# Altium PCB chicker.PcbDoc
Units mm, origin at the board's own origin, x right, y up, seen from the top; angles counter-clockwise.
Board outline 98.04 x 99.82 mm, 2 copper layers (Top Layer, Bottom Layer); 29 components, 18 nets, 100 pads, 33 vias.
Unrouted connection lines stored in the file: 10.
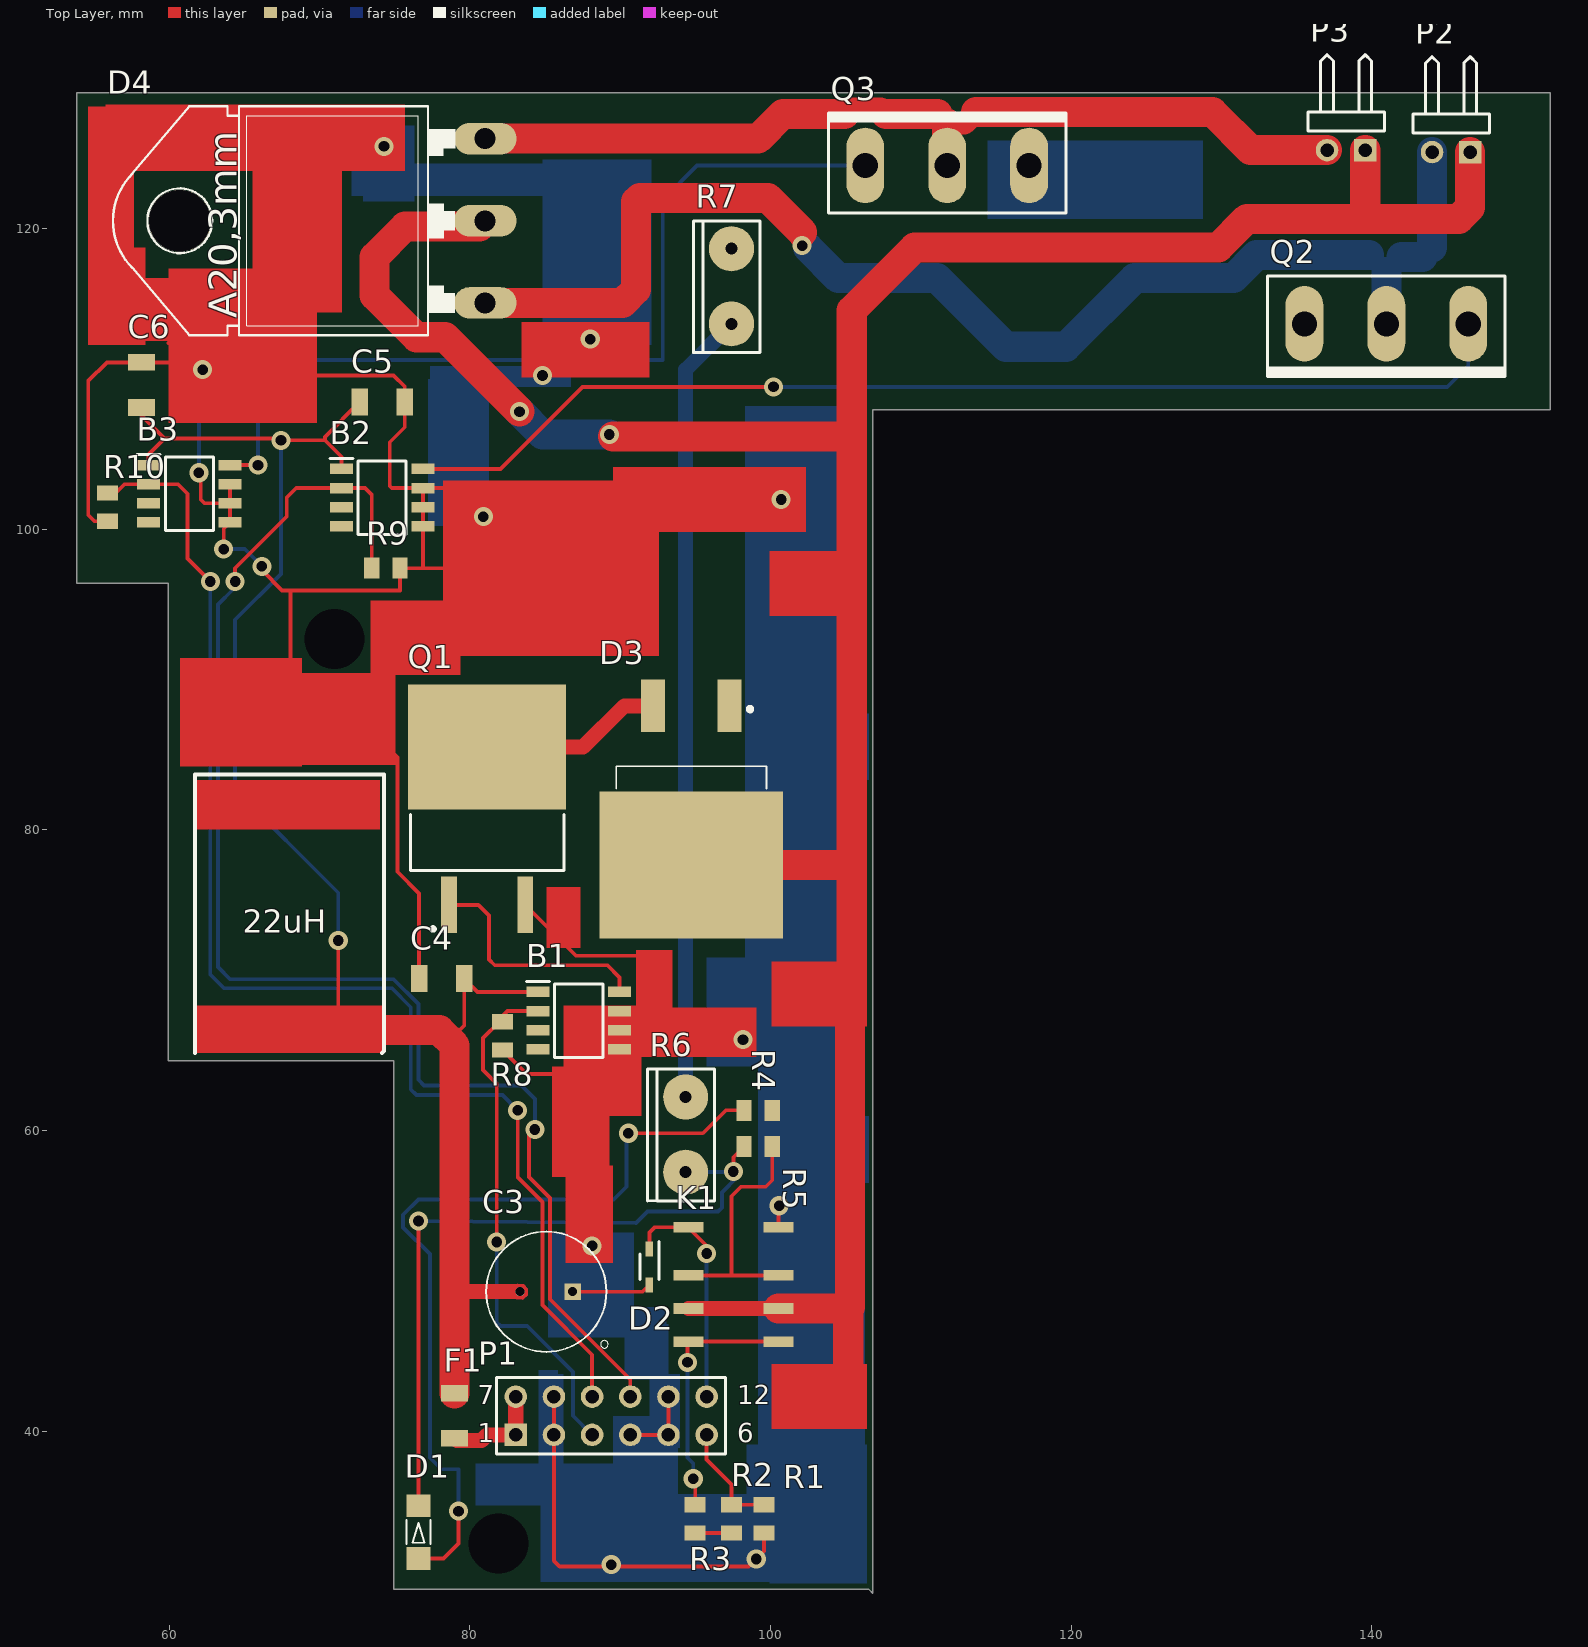
[diagram p0: Top Layer view]
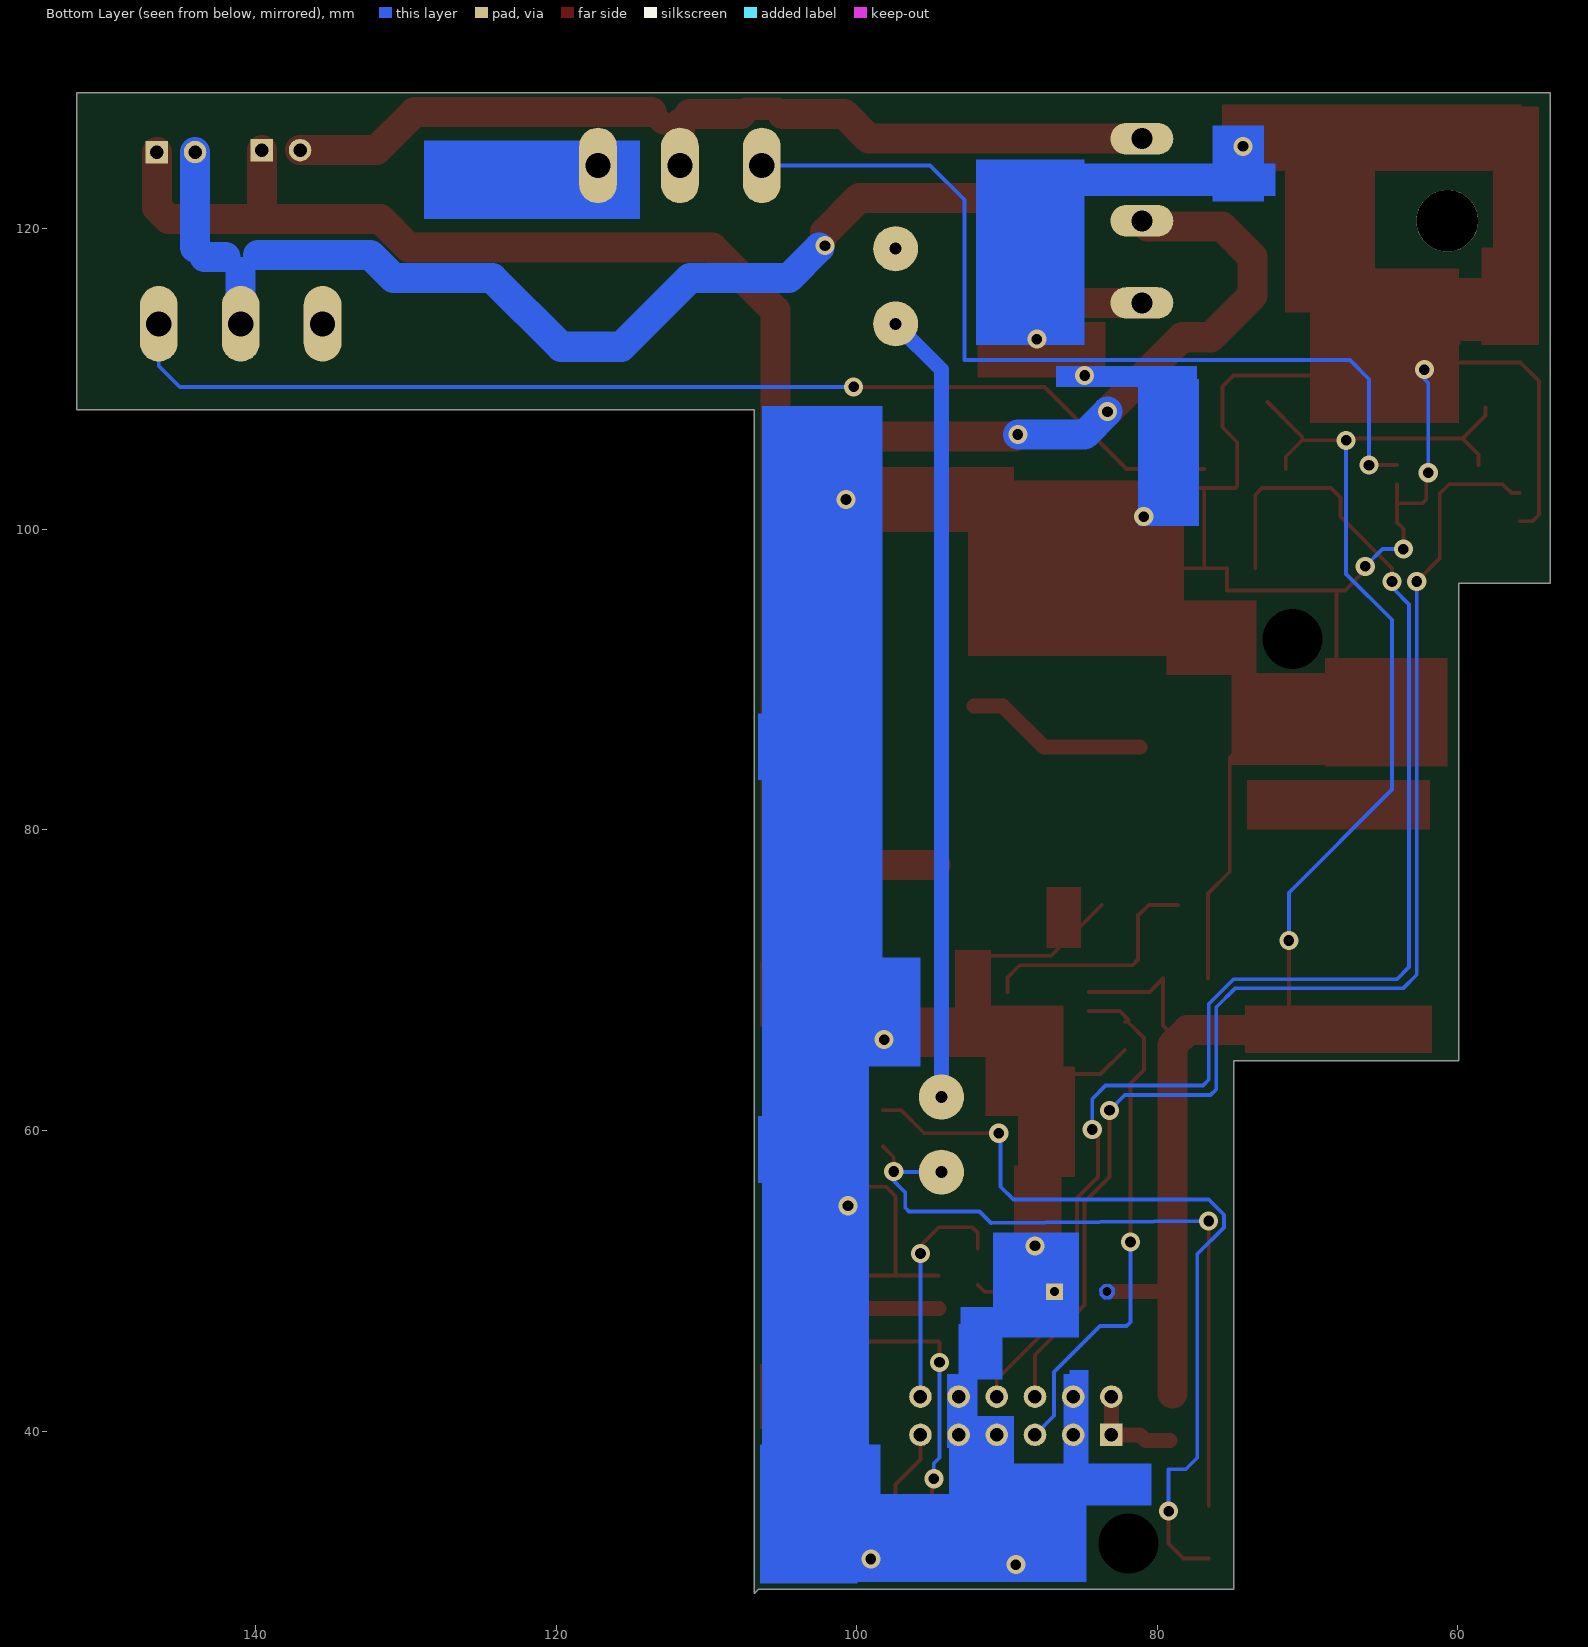
[diagram p1: Bottom Layer view, seen from below]

## Layer stack, top to bottom
Top Solder: solder mask 0.0102, Solder Resist, Dk 3.5
Top Layer: signal copper 0.0356
Dielectric 1: dielectric 0.32, FR-4, Dk 4.8
Bottom Layer: signal copper 0.0356
Bottom Solder: solder mask 0.0102, Solder Resist, Dk 3.5

## Board outline
74.93,29.464 74.93,64.643 59.944,64.643 59.944,96.393 53.848,96.393 53.848,129.032 151.892,129.032 151.892,107.95 106.807,107.95 106.807,29.21 106.553,29.464 74.93,29.464

## Design rules (kind name [scope] priority, off if disabled: settings)
Clearance [All] p1: gap=0.254
PolygonConnect [All] p1: connectstyle=Relief reliefconductorwidth=0.254 reliefentries=4 polygonreliefangle="90 Angle" airgapwidth=0.254
RoomDefinition chicker [InComponentClass('chicker')] p1: confinementstyle=ConfineIn formatcopy=TRUE lockcomponents=FALSE outline 178.943,26.797 392.049,26.797 392.049,57.404 178.943,57.404
RoutingVias [All] p1: holewidth=0.711 width=1.27 viastyle="Through Hole" minholewidth=0.711 minwidth=1.27 maxholewidth=0.711 maxwidth=1.27
SolderMaskExpansion [All] p1: expansion=0.102
Width [All] p1: maxlimit=0.254 minlimit=0.254 preferedwidth=0.254
30 further rules are at their usual default settings.

## Components (designator, comment, footprint, x,y, rotation, side; value= is the part's Value field where it differs from the comment)
B1 "MIC5020YM" SOIC127P600X188-8N 87.249,67.31 r0 top
B2 "MIC5020YM" SOIC127P600X188-8N 74.168,102.108 r0 top
B3 "MIC5020YM" SOIC127P600X188-8N 61.341,102.362 r0 top
C3 "ECA-1HM101" CAPPRD350W60D800H1150B_ECA-1HM101(Primary) 85.09,49.276 r180 top
C4 "CL31A226KOCLFNC" CAPC3216X100N 78.129,70.104 r180 top
C5 "CL31A226KOCLFNC" CAPC3216X100N 74.168,108.458 r0 top
C6 "CL31A226KOCLFNC" CAPC3216X100N 58.166,109.601 r90 top
D1 "RED" WL-SMRW-1206-RECT 76.581,33.274 r270 top
D2 "NSR0240HT1G" SOD2512X110N 91.948,50.927 r270 top
D3 "STTH10R04G-TR" DPAK508P1542X460-3N 94.742,81.534 r180 top
D4 "RURG3060CC" SOT93_TIP147(Primary) 70.866,120.523 r90 top
F1 "Fuse 1" FUSM3216X140N 78.994,41.021 r270 top
K1 "IM03DGR" GULLWINGS 97.536,49.657 r270 top
P1 "Header 6X2A" HDR2X6_CEN 83.058,39.751 r0 top
P2 "Header 2H" HDR1X2H 146.558,125.095 r180 top
P3 "Header 2H" HDR1X2H 139.573,125.222 r180 top
Q1 "STB45N65M5" TO254P1542X460-3N 81.153,81.407 r90 top
Q2 "FGA180N33ATDTU" TO-3PN_V_FDA69N25(Primary) 140.981,113.665 r180 top
Q3 "FGA180N33ATDTU" TO-3PN_V_FDA69N25(Primary) 111.76,124.206 r0 top
R1 "2.2k" RESC2013X65N 99.568,34.163 r90 top
R2 "" RESC2013X65N 97.409,34.163 r90 top
R3 "" RESC2013X65N 94.996,34.163 r270 top
R4 "" RESC2013X65N 99.187,61.341 r180 top
R5 "" RESC2013X65N 99.187,58.928 r0 top
R6 "PF2203-2KF1" POWER_DIODE 94.361,57.23 r90 top
R7 "PF2203-2KF1" POWER_DIODE 97.409,113.665 r90 top
R8 "" RESC2013X65N 82.169,66.294 r270 top
R9 "" RESC2013X65N 74.422,97.409 r0 top
R10 "" RESC2013X65N 55.88,101.473 r270 top

## Footprints (in the part's own frame and the unit in brackets; to place one, negate y for a bottom-side part, rotate by r counter-clockwise, add the part's x,y. Pads: shape width x height; smd on the part's side, far side on the other; paste and mask are expansions set on the pad)
CAPC3216X100N [mm]
  rect 1.1x1.8 smd: 1(-1.5,0) 2(1.5,0)
CAPPRD350W60D800H1150B_ECA-1HM101(Primary) [mm]
  rect 1.108x1.108 hole 0.6: NEG(-1.75,0)
  round 0.6 hole 0.6: POS(1.75,0)
  Top Layer region: 2.271,0.189 1.984,0.502 1.561,0.521 1.248,0.234 1.229,-0.189 1.516,-0.502 1.939,-0.521 2.252,-0.234
  Bottom Layer region: 2.271,0.189 1.984,0.502 1.561,0.521 1.248,0.234 1.229,-0.189 1.516,-0.502 1.939,-0.521 2.252,-0.234
  Multi-Layer region: 2.271,0.189 1.984,0.502 1.561,0.521 1.248,0.234 1.229,-0.189 1.516,-0.502 1.939,-0.521 2.252,-0.234
  silkscreen extent -4.12,-4 4,4
DPAK508P1542X460-3N [mm]
  rect 1.6x3.5 smd: 1(-2.54,-6.715) 2(2.54,-6.715)
  rect 12.2x9.75 smd: 3(0,3.87)
  silkscreen extent -5,-6.64 5,-1.2
FUSM3216X140N [mil]
  rect 44x71 smd: 1(-59,0) 2(59,0)
GULLWINGS [mm]
  rect 0.7x2 smd: 1(-3.9,-3) 2(-0.7,-3) 3(1.5,-3) 4(3.7,-3) 5(3.7,3) 6(1.5,3) 7(-0.7,3) 8(-3.9,3)
HDR1X2H [mm] "Connector; Header; 2 Position; Right Angle"
  rect 1.5x1.5 hole 0.9: 1(0,0)
  round 1.5 hole 0.9: 2(2.54,0)
  silkscreen extent -1.27,-6.35 3.81,-1.27
HDR2X6_CEN [mm] "Connector; Header; 6x2 Position"
  rect 1.5x1.5 hole 0.9: 1(0,0)
  round 1.5 hole 0.9: 2(2.54,0) 3(5.08,0) 4(7.62,0) 5(10.16,0) 6(12.7,0) 7(0,2.54) 8(2.54,2.54) 9(5.08,2.54) 10(7.62,2.54) 11(10.16,2.54) 12(12.7,2.54)
  silkscreen extent -1.27,-1.27 13.97,3.81
POWER_DIODE [mm]
  round 3 hole 0.8: A(0,0) K(5,0)
  silkscreen extent -1.91,-1.91 6.86,2.54
RESC2013X65N [mil]
  rect 40x55 smd: 1(-37,0) 2(37,0)
SOD2512X110N [mm]
  rect 1x0.5 smd: 1(-1.2,0) 2(1.2,0)
  silkscreen extent -1.7,-0.63 0.85,0.63
SOIC127P600X188-8N [mm]
  rect 1.525x0.7 smd: 1(-2.712,1.905) 2(-2.712,0.635) 3(-2.712,-0.635) 4(-2.712,-1.905) 5(2.712,-1.905) 6(2.712,-0.635) 7(2.712,0.635) 8(2.712,1.905)
  silkscreen extent -3.47,-2.45 1.6,2.61
SOT93_TIP147(Primary) [mil]
  oval 82.5x165 hole 55: B(-215,-400) C(0,-400) E(215,-400)
  round 162 hole 162 unplated: None(0,400)
  silkscreen extent -300,-321 300,575
TO254P1542X460-3N [mm]
  rect 3.75x1.05 smd: 1(-6.4,2.54) 3(-6.4,-2.54)
  rect 8.3x10.5 smd: 4(4.1,0)
  silkscreen extent -8.12,-5.1 -0.4,5.1
TO-3PN_V_FDA69N25(Primary) [mil]
  oval 99x198 hole 66: D(0,0) G(-214.57,0) S(214.57,0)
  silkscreen extent -311,-125 311,138
WL-SMRW-1206-RECT [mm]
  rect 1.5x1.6 smd: 1(-1.75,0) 2(1.75,0)
  silkscreen extent -0.8,-0.8 0.8,0.8

## Part data
B1 B2 B3: "Low-Side Gate Driver IC Non-Inverting 8-SOIC"
C3: "CAP ALUM 100UF 20% 50V RADIAL"
C4 C5 C6: "CAP CER 10UF 25V X5R 1206"
D1: library part WL-SMRW, "LED RED CLEAR 1206 SMD"
D2: "SMT Schottky Diode, 40V dc 250mA, 3ns, 2-pin SOD-323"
D3: library part "Diode 1N914", "DIODE GEN PURP 400V 10A D2PAK"
D4: "DIODE ARRAY GP 600V 30A TO247"
F1: "FUSE BOARD MOUNT 5A 32VDC 1206"
K1: "Relay, Signal, Dpdt, 250vac, 220vdc, 5a"
P1: "Header, 6-Pin, Dual row"
P2 P3: "2 Positions Header Connector 0.100\" (2.54mm) Through Hole, Right Angle Tin"
Q1: "MOSFET N CH 650V 35A D2PAK"
Q2 Q3: "IGBT Trench 330V 180A 390W Through Hole TO-3P"
R1: library part RC0805FR-072K2L, "RES SMD 2.2K OHM 1% 1/8W 0805"
R2 R3: library part RC0805FR-072K2L, "RES SMD 100K OHM 1% 1/8W 0805"
R4 R5: library part RC0805FR-072K2L, "RES SMD 160 OHM 1% 1/8W 0805"
R6 R7: library part Res3, "RES 2K OHM 35W 1% TO220"
R8 R9 R10: library part RC0805FR-072K2L, "RES SMD 10K OHM 1% 1/8W 0805"

## Free pads (board coordinates)
  round 1.524 hole 4 unplated: 0(81.915,32.512) 1(70.993,92.71)

## Via types
v1: diameter 1.27, hole 0.711, Top Layer to Bottom Layer, 33 vias

## Nets (pads, with @x,y where several pads share a name; then routed paths per layer and width w, separated by ;. In a path a pad name is that pad's centre, name@x,y a point inside that pad or via, vN(x,y) a via of type N, cw(c..) or ccw(c..) an arc to the next point about the centre after c; other vN are vias at no path point)
+BATT: B1.1 B2.1 B3.1 C3.POS C4.1 C5.1 C6.1 F1.2 P1.1 P1.7 | length 96.8
  Top Layer w0.254: C6.1 58.166,107.569 59.69,106.045 ; B3.1 58.629,104.984 59.69,106.045 ; 71.247,66.675 v1@71.247,72.39 ; B2.1 71.456,104.82 70.358,105.918 ; C5.1 70.358,106.148 70.358,105.918 ; F1.2 F1.2@79.146,39.37 ; 79.629,66.977 C4.1 80.518,69.215 B1.1 ; 59.69,106.045 67.31,106.045 v1(67.437,105.918) 70.358,105.918
  Top Layer w1: 78.994,49.276 C3.POS ; F1.2@79.146,39.37 80.772,39.37 81.153,39.751 P1.1 P1.7
  Top Layer w2: 71.247,66.675 77.978,66.675 ; 78.994,59.436 78.994,65.659
  Bottom Layer w0.254: v1@67.437,105.664 67.437,97.028 64.389,93.98 64.389,82.677 71.247,75.819 v1(71.247,72.644)
CAP+: D3.3 D4.C K1.3 K1.6 P2.1 P3.1 | length 186.4
  Top Layer w0.254: D4.C@80.645,120.142 D4.C ; 104.029,68.516 105.283,67.262 ; 105.18,48.157 105.283,48.26 ; P3.1 P3.1@139.7,125.349
  Top Layer w2: D4.C@80.645,120.142 75.692,120.142 73.66,118.11 73.66,115.57 76.454,112.776 78.359,112.776 v1(83.312,107.823) ; v1@89.535,106.172 105.41,106.172 ; D3.3 105.35,77.664 ; K1.6 105.18,48.157 105.18,42.061 ; 105.283,48.26 105.283,67.262 ; 105.41,69.088 105.41,106.172 ; P3.1 139.573,120.65 ; P2.1 146.558,121.412 145.796,120.65 139.573,120.65 ; 105.41,106.172 105.41,114.554 109.601,118.745 129.794,118.745 131.699,120.65 139.573,120.65
  Bottom Layer w2: v1(83.312,107.823) 84.836,106.299 v1(89.281,106.299)
CHARGE: B1.2 P1.3 R8.1 | length 34.7
  Top Layer w0.254: v1(81.788,52.578) 81.788,63.119 80.883,64.024 80.883,66.151 81.966,67.234 R8.1 ; R8.1@81.915,67.361 82.499,67.945 B1.2
  Bottom Layer w0.254: v1@81.788,52.197 81.788,47.244 82.042,46.99 83.82,46.99 86.868,43.942 86.868,41.021 P1.3
CHIP-: B3.2 D4.E P1.9 P3.2 Q3.D R10.1 | length 147.6
  Top Layer w0.254: R10.1 56.439,102.413 57.023,102.997 B3.2 60.579,102.997 61.214,102.362 61.214,98.044 v1(62.738,96.52) ; v1@83.185,60.96 83.185,56.896 84.836,55.245 84.836,48.387 88.138,45.085 P1.9 ; 111.125,127.635 111.76,127 112.903,127
  Top Layer w1.5: 104.93,127.635 105.27,127.975 107.35,127.975 107.69,127.635 ; 112.903,127 113.665,127.762
  Top Layer w2: D4.E 99.187,125.984 100.838,127.635 104.93,127.635 ; 107.69,127.635 111.125,127.635 ; Q3.D 111.76,127 ; 113.665,127.762 129.413,127.762 131.953,125.222 P3.2
  Bottom Layer w0.254: v1@62.738,96.139 62.738,70.358 63.627,69.469 74.803,69.469 76.073,68.199 76.073,62.738 76.454,62.357 82.169,62.357 v1(83.185,61.341)
GND: B1.5 B1.6 B1.7 B2.5 B2.6 B2.7 B3.5 B3.6 B3.7 C3.NEG C4.2 C5.2 C6.2 D2.2 K1.8 P1.2 P1.4 P1.5 P1.8 P1.11 Q1.3 Q2.S Q3.S R1.1 R8.2 R9.2 R10.2 | length 162.1
  Top Layer w0.254: R10.2 55.042,100.533 54.61,100.965 54.61,109.855 55.856,111.101 C6.2 62,111.101 60.706,112.395 59.944,112.395 ; v1@62.103,103.505 62.103,101.981 62.357,101.727 B3.6 ; v1(63.627,98.679) 63.627,100.031 B3.5 B3.6 ; B3.7 B3.6 ; v1@66.167,97.282 67.513,95.936 68.072,95.936 ; 68.072,90.678 68.072,95.936 ; 68.326,110.236 74.93,110.236 75.668,109.498 C5.2 75.668,106.783 74.676,105.791 74.676,102.87 74.803,102.743 B2.7 ; 73.533,86.487 75.184,84.836 75.184,77.216 76.629,75.771 C4.2 ; 80.01,102.743 B2.7 ; 81.534,97.409 76.835,97.409 ; R8.2 83.769,63.754 87.122,63.754 ; Q1.3 87.072,71.628 91.948,71.628 92.583,70.993 92.583,67.056 ; P1.8 P1.2 85.598,31.369 85.979,30.988 98.552,30.988 v1(99.06,31.496) 99.568,32.004 R1.1 ; C3.NEG 91.497,49.276 D2.2 ; P1.4 P1.5 ; P1.5@93.091,39.624 P1.5 ; P1.11 P1.5 ; K1.8 100.536,54.658 v1@100.584,54.706 ; 68.072,95.936 75.362,95.936 R9.2 76.835,97.409 ; 76.835,97.409 76.88,97.454 B2.5 B2.6 B2.7
  Bottom Layer w0.254: v1(61.976,103.759) 61.976,109.728 62.23,109.982 ; v1@64.008,98.679 65.024,98.679 v1(66.167,97.536)
  other v1: 89.408,31.115 88.138,52.324 100.584,54.991 98.171,66.04 80.899,100.838 100.711,101.981 84.836,110.236 62.23,110.617 88.011,112.649 74.295,125.476
KICK-: B2.2 D4.B P1.10 P2.2 Q2.D R9.1 | length 180.7
  Top Layer w0.254: v1(64.389,96.52) 64.389,97.409 67.818,100.838 67.818,102.108 68.453,102.743 B2.2 73.025,102.743 73.482,102.286 R9.1 ; v1@83.947,59.944 83.947,56.896 85.344,55.499 85.344,48.768 90.678,43.434 P1.10 ; 91.059,121.793 91.313,122.047 ; v1(102.108,118.872) 102.108,119.761
  Top Layer w2: D4.B 90.17,115.062 91.059,115.951 91.059,121.793 ; 91.313,122.047 99.822,122.047 102.108,119.761
  Bottom Layer w0.254: v1@64.262,96.012 63.246,94.996 63.246,70.866 64.052,70.06 74.93,70.06 76.581,68.409 76.581,63.373 76.962,62.992 83.439,62.992 84.328,62.103 v1(84.328,60.071) ; 139.827,118.237 140.959,117.105 140.981,117.105 141.986,118.11 ; 143.383,118.11 144.018,118.745
  Bottom Layer w2: v1@102.489,118.745 104.521,116.713 111.093,116.713 115.665,112.141 119.666,112.141 124.238,116.713 130.81,116.713 132.334,118.237 139.827,118.237 ; Q2.D 140.981,117.105 ; 141.986,118.11 143.383,118.11 ; 144.018,118.745 P2.2
NC-1/2: K1.2 K1.7 R4.1 R5.2 | length 16.7
  Top Layer w0.254: K1.2 97.409,50.357 ; R5.2 100.127,56.693 99.695,56.261 98.044,56.261 97.409,55.626 97.409,50.357 ; K1.7 97.409,50.357
NetB1_8: B1.8 Q1.1 | length 16
  Top Layer w0.254: Q1.1 80.568,75.007 81.28,74.295 81.28,71.374 81.661,70.993 89.154,70.993 89.961,70.186 B1.8
NetB2_8: B2.8 Q2.G | length 74.9
  Top Layer w0.254: B2.8 82.042,104.013 87.503,109.474 v1@99.949,109.474
  Bottom Layer w0.254: v1(100.203,109.474) 145.034,109.474 146.431,110.871 Q2.G
NetB3_8: B3.8 Q3.G | length 59.7
  Top Layer w0.254: B3.8 v1@65.532,104.267
  Bottom Layer w0.254: v1(65.913,104.267) 65.913,109.982 67.183,111.252 92.837,111.252 92.837,121.92 95.123,124.206 Q3.G
NetD1_1: D1.1 R5.1 R6.A | length 47.2
  Top Layer w0.254: D1.1 v1(76.581,53.975) ; v1(97.536,57.277) 97.536,58.217 R5.1
  Bottom Layer w0.254: v1(76.581,53.975) 91.059,53.848 91.821,54.61 96.52,54.61 96.774,54.864 96.774,55.88 v1@97.79,56.896 ; R6.A 97.489,57.23 v1(97.536,57.277)
NetD1_2: D1.2 R4.2 | length 54.3
  Top Layer w0.254: D1.2 78.26,31.524 79.248,32.512 v1@79.248,34.29 ; v1(90.551,59.817) 95.504,59.817 97.028,61.341 R4.2
  Bottom Layer w0.254: v1(79.248,34.671) 79.248,37.465 78.105,37.465 77.343,38.227 77.343,51.776 75.565,53.554 75.565,54.396 76.581,55.412 89.575,55.412 90.424,56.261 90.424,59.69 v1(90.551,59.817)
NetD2_1: D2.1 K1.1 P1.12 | length 15.6
  Top Layer w0.254: D2.1 91.948,53.213 92.292,53.557 K1.1 95.758,52.335 v1(95.758,51.816)
  Bottom Layer w0.254: P1.12 v1(95.758,51.816)
NetD3_1: D3.2 Q1.4 | length 12.2
  Top Layer w1: Q1.4 87.539,85.507 90.281,88.249 D3.2
NetP1_6: P1.6 R1.2 R2.2 | length 7.5
  Top Layer w0.254: P1.6 95.758,38.1 97.409,36.449 R2.2 R1.2
NetR2_1: R2.1 R3.2 | length 2.4
  Top Layer w0.254: R3.2 R2.1
NetR6_2: R6.K R7.A | length 52.7
  Bottom Layer w1: R6.K 94.361,110.617 R7.A
NO-1/2: K1.4 K1.5 R3.1 | length 17.1
  Top Layer w0.254: v1(94.488,44.577) 94.488,45.909 K1.4 K1.5 ; v1(94.869,36.83) 94.996,36.703 R3.1
  Bottom Layer w0.254: v1(94.488,44.577) 94.488,38.227 94.869,37.846 v1(94.869,36.83)
pads on no net: B1.3 B1.4 B2.3 B2.4 B3.3 B3.4 D3.1 D4.None F1.1 R7.K
copper on no net: | length 27.8
  Top Layer w0.254: 77.978,66.675 79.327,66.675 79.629,66.977 ; 100.536,48.157 100.56,48.133
  Top Layer w1: 94.536,48.157 100.536,48.157
  Top Layer w2: 77.978,66.675 78.994,65.659 ; 78.994,42.52 78.994,61.087

## Other copper
Top Layer:
  rectangle net GND: 83.439,110.109 91.948,113.792
  rectangle net GND: 91.059,67.945 93.472,72.009
  rectangle net GND: 85.09,72.136 87.376,76.2
  rectangle net GND: 73.406,90.297 79.375,95.25
  rectangle net GND: 67.056,84.328 75.057,90.424
  rectangle net GND: 60.706,84.201 68.834,91.44
  rectangle net GND: 55.753,123.825 75.692,128.27
  rectangle net GND: 54.61,116.459 57.658,128.143
  rectangle net GND: 89.535,99.822 102.362,104.14
  rectangle net GND: 90.805,64.897 99.06,68.199
  rectangle net GND: 86.233,60.96 91.44,68.326
  rectangle net GND: 86.36,51.181 89.535,57.658
  rectangle net GND: 85.471,56.896 89.281,64.262
  rectangle net GND: 65.532,114.427 71.501,126.492
  rectangle net GND: 55.245,112.522 63.246,116.713
  rectangle net GND: 54.61,112.268 58.42,118.745
  rectangle net GND: 59.944,107.061 69.85,117.348
  rectangle net GND: 78.232,91.567 92.583,103.251
  rectangle net CAP+: 100.076,40.132 106.426,44.45
  rectangle net CAP+: 99.949,94.234 106.299,98.552
  rectangle net CAP+: 100.076,66.929 106.426,71.247
  rectangle: 61.849,80.01 74.041,83.312
  rectangle net +BATT: 61.722,65.151 74.168,68.326
Bottom Layer:
  rectangle net GND: 114.427,120.65 128.778,125.857
  rectangle net GND: 77.216,100.203 81.28,109.982
  rectangle net GND: 77.343,109.474 86.741,110.871
  rectangle net GND: 84.836,112.268 92.075,124.587
  rectangle net GND: 72.136,122.174 89.027,124.333
  rectangle net GND: 72.898,121.793 76.327,126.873
  rectangle net GND: 98.298,69.215 106.299,108.204
  rectangle net GND: 95.758,64.262 106.299,71.501
  rectangle net GND: 99.187,36.957 106.299,65.786
  rectangle net GND: 85.217,46.228 90.932,53.213
  rectangle net GND: 90.297,43.434 93.218,47.117
  rectangle: 88.519,46.228 93.091,48.26
  rectangle net GND: 91.948,38.862 93.98,43.815
  rectangle net GND: 89.535,33.528 93.853,41.021
  rectangle net GND: 98.425,32.639 106.426,39.116
  rectangle net GND: 85.09,37.084 86.233,43.815
  rectangle net GND: 84.582,37.719 85.852,44.069
  rectangle net GND: 80.391,35.052 92.71,37.846
  rectangle net GND: 84.709,29.972 100.33,35.814
  rectangle net GND: 99.949,29.845 106.426,34.29
  rectangle: 100.076,56.515 106.553,60.96
  rectangle: 100.076,83.312 106.553,87.757

## Silkscreen, mask and mechanical layers (free items; w line width, h text height)
Top Overlay:
  lines w0.254: 61.722,65.151 61.722,83.693 74.295,83.693 74.295,65.278 74.168,65.151
  text "22uH" at 64.897,73.152 h1.52
Top Solder:
  rectangle: 99.695,93.853 106.68,98.806
  rectangle: 99.695,66.675 106.68,71.628
  rectangle: 99.695,39.878 106.68,44.831
  rectangle: 61.722,79.883 74.295,83.439
  rectangle: 61.595,65.024 74.295,68.453
Bottom Solder:
  rectangle: 99.695,29.591 106.68,34.544
  rectangle: 99.822,56.388 106.807,61.341
  rectangle: 99.822,83.058 106.807,88.011

## Text inside footprints (layer, text, board x,y; h text height)
D4: Top Overlay "A20,3mm" at 64.503,114.037 h1.88 r90
P1: Top Overlay "12" at 97.79,41.783 h1.27; Top Overlay "6" at 97.79,39.243 h1.27; Top Overlay "1" at 80.518,39.243 h1.27; Top Overlay "7" at 80.518,41.783 h1.27
Q2: Mechanical 1 "S" at 135.759,115.826 h1.88 r180; Mechanical 1 "G" at 146.712,115.825 h1.88 r180; Mechanical 1 "D" at 141.236,115.824 h1.88 r180
Q3: Mechanical 1 "S" at 116.982,122.045 h1.88; Mechanical 1 "G" at 106.029,122.046 h1.88; Mechanical 1 "D" at 111.505,122.047 h1.88